# Altium PCB 24+Channel+PCB.pcbdoc (part 2 of 4)
Units mm, origin at the board's own origin, x right, y up, seen from the top; angles counter-clockwise.
Board outline 213.4 x 117.5 mm, 2 copper layers (Top Layer, Bottom Layer); 559 components, 339 nets, 1681 pads, 746 vias.
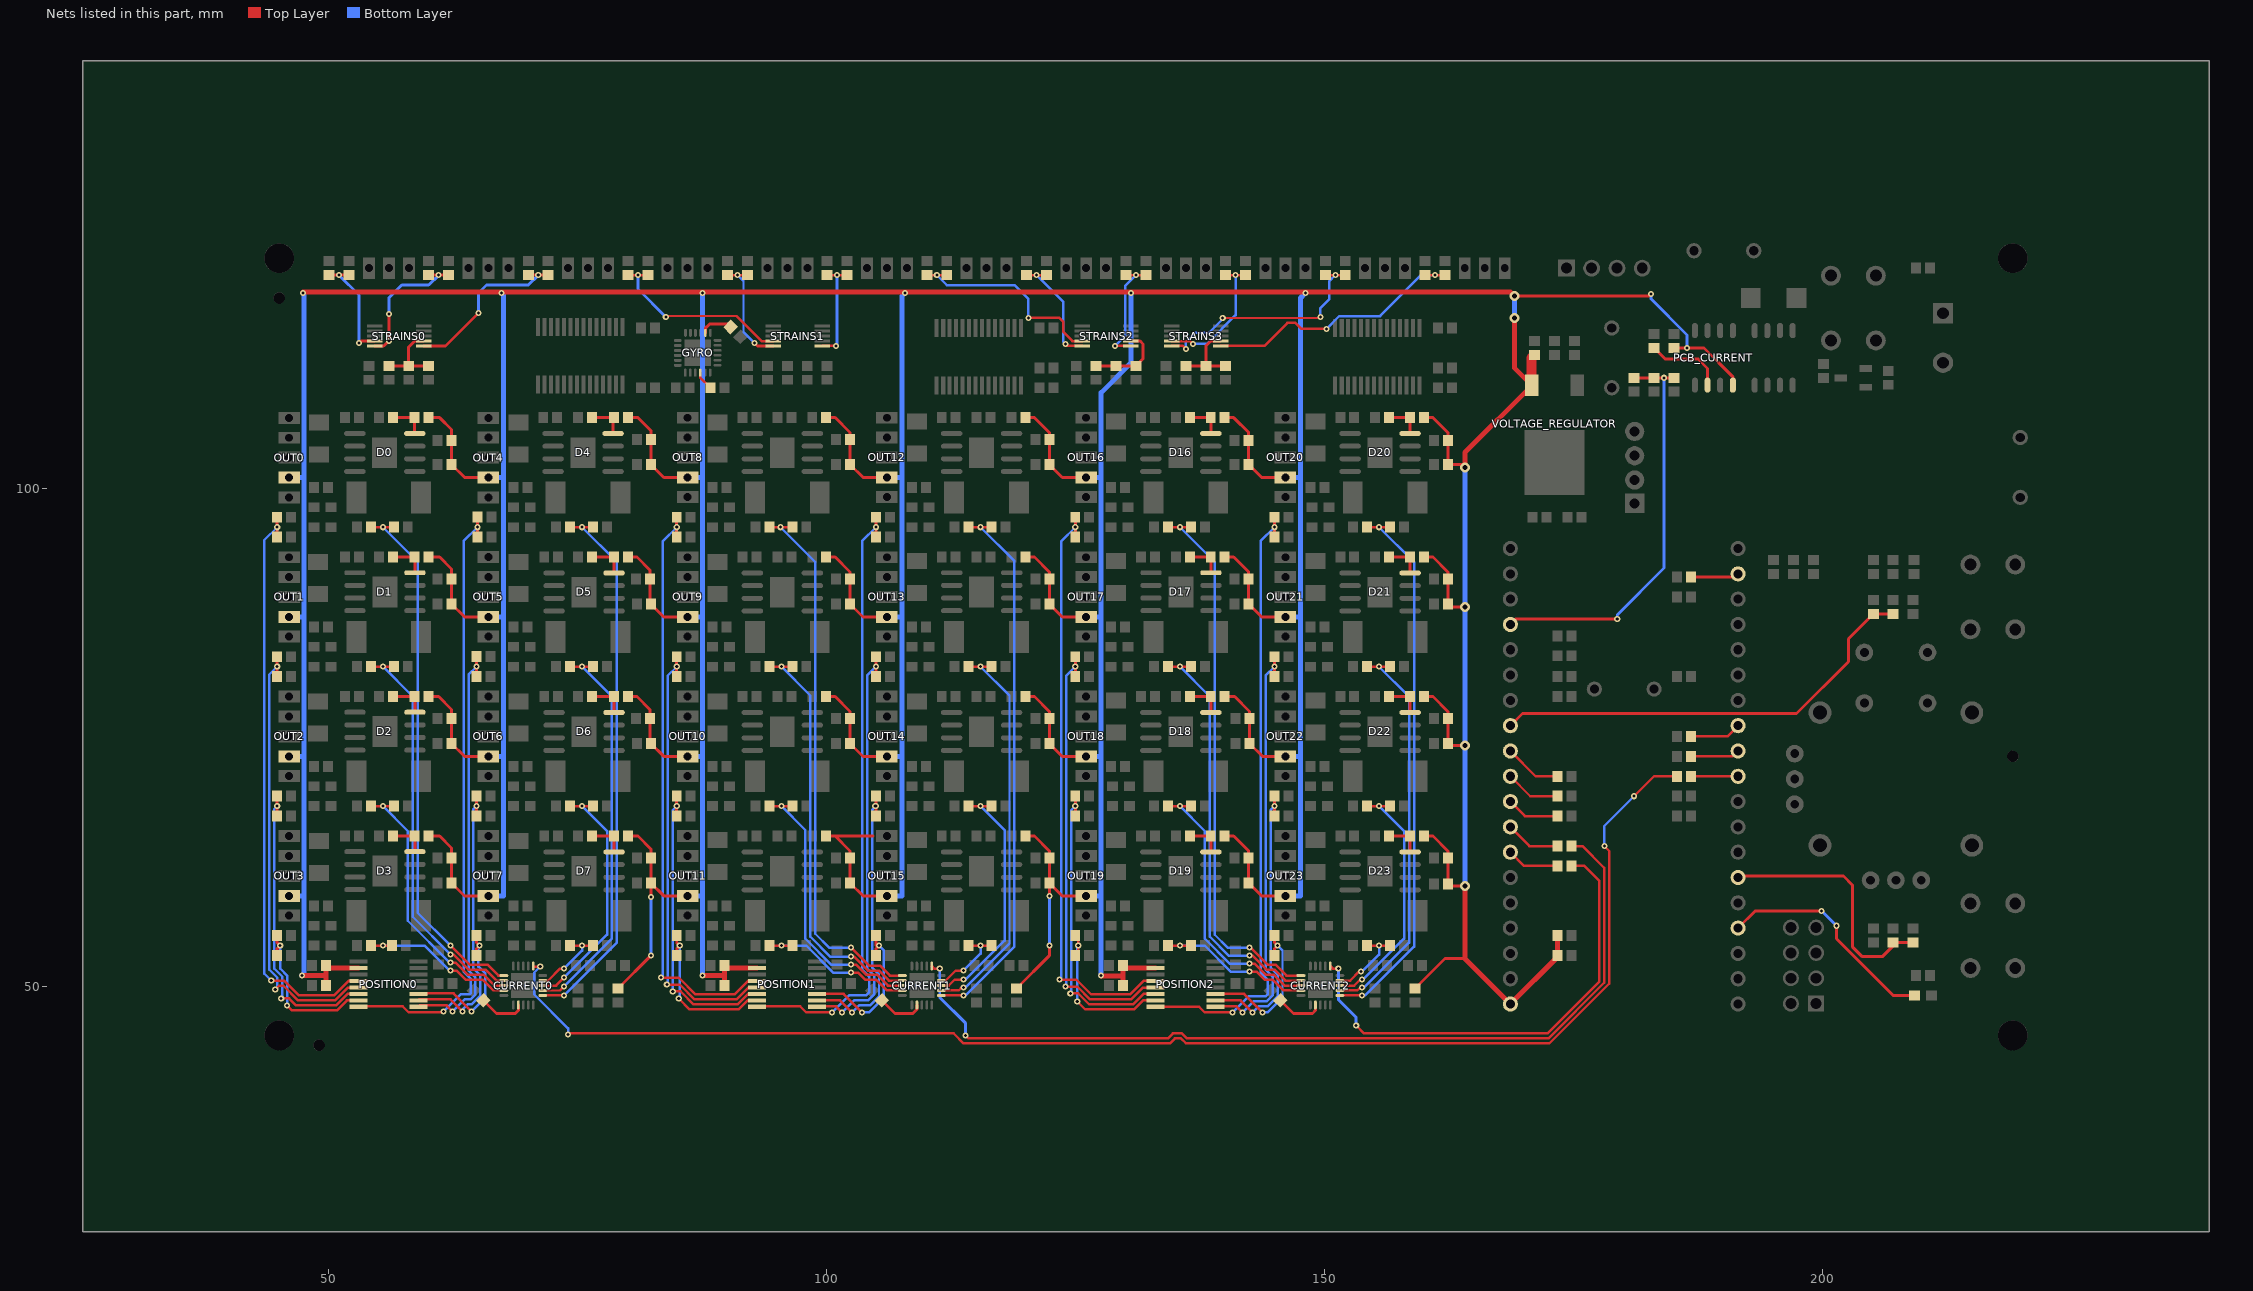
[diagram p2: the nets of this part, all layers, seen from the top]

## Via types
v1: diameter 0.61, hole 0.305, Top Layer to Bottom Layer, 627 vias
v2: diameter 1, hole 0.5, Top Layer to Bottom Layer, 113 vias
v3: diameter 2, hole 1, Top Layer to Bottom Layer, 6 vias

## Nets (pads, with @x,y where several pads share a name; then routed paths per layer and width w, separated by ;. In a path a pad name is that pad's centre, name@x,y a point inside that pad or via, vN(x,y) a via of type N, cw(c..) or ccw(c..) an arc to the next point about the centre after c; other vN are vias at no path point) (continued)
+5V: CCD.2 CESPD5V.1 CESPDD5V.1 CPDA0.1 CPDA1.1 CPDA2.1 CPDDA0.1 CPDDA1.1 CPDDA2.1 CVR3.2 OUT0.P2 OUT1.P2 OUT2.P2 OUT3.P2 OUT4.P2 OUT5.P2 OUT6.P2 OUT7.P2 OUT8.P2 OUT9.P2 OUT10.P2 OUT11.P2 OUT12.P2 OUT13.P2 OUT14.P2 OUT15.P2 OUT16.P2 OUT17.P2 OUT18.P2 OUT19.P2 OUT20.P2 OUT21.P2 OUT22.P2 OUT23.P2 pad.1 PCB_CURRENT.8 POSITION0.2 POSITION1.2 POSITION2.2 RCH0.1 RCH1.1 RCH2.1 RH0.2 RH1.2 RH2.2 RH3.2 RH4.2 RH5.2 RH6.2 RH7.2 RH8.2 RH9.2 RH10.2 RH11.2 RH12.2 RH13.2 RH14.2 RH15.2 RH16.2 RH17.2 RH18.2 RH19.2 RH20.2 RH21.2 RH22.2 RH23.2 RPWM0A.1 RPWM0B.1 RPWM1A.1 RPWM1B.1 RPWM2A.1 RPWM2B.1 RPWM3A.1 RPWM3B.1 RPWM4A.2 RPWM4B.2 RPWM5A.2 RPWM5B.2 RPWM6A.2 RPWM6B.2 RPWM7A.2 RPWM7B.2 RPWM8A.1 RPWM8B.1 RPWM9A.1 RPWM9B.1 RPWM10A.1 RPWM10B.1 RPWM11A.1 RPWM11B.1 RPWM12A.2 RPWM12B.2 RPWM13A.2 RPWM13B.2 RPWM14A.2 RPWM14B.2 RPWM15A.2 RPWM15B.2 RPWM16A.1 RPWM16B.1 RPWM17A.1 RPWM17B.1 RPWM18A.1 RPWM18B.1 RPWM19A.1 RPWM19B.1 RPWM20A.2 RPWM20B.2 RPWM21A.2 RPWM21B.2 RPWM22A.2 RPWM22B.2 RPWM23A.2 RPWM23B.2 VOLTAGE_REGULATOR.3 | length 964.8
  Top Layer w0.3: RH3.2@60.1,65.1 61.2,65.1 62.4,63.9 RPWM3A.1@62.4,62.9 RPWM3B.1@62.4,60.4 63.707,59.093 OUT7.P2@66.1,59.093 ; RH2.2@60.1,79.1 61.1,79.1 62.4,77.8 RPWM2A.1@62.4,76.9 RPWM2B.1@62.4,74.4 63.694,73.106 OUT6.P2@66.1,73.106 ; RH1.2@60.1,93.1 61.2,93.1 62.4,91.9 RPWM1A.1@62.4,90.9 RPWM1B.1@62.4,88.4 63.694,87.106 OUT5.P2@66.1,87.106 ; RH0.2@60.1,107.1 61.2,107.1 62.4,105.9 RPWM0A.1@62.4,104.8 RPWM0B.1@62.4,102.4 63.719,101.081 OUT4.P2@66.1,101.081 ; RCH0.1@79.1,49.801 v1(82.4,53.1) ; RH7.2@80.1,65.1 81.1,65.1 82.4,63.8 RPWM7A.2@82.4,62.9 RPWM7B.2@82.4,60.4 ; RH6.2@80.1,79.1 81,79.1 82.3,77.8 RPWM6A.2@82.3,76.9 82.3,74.5 RPWM6B.2@82.4,74.4 83.7,73.1 OUT10.P2@86.1,73.1 ; RH5.2@80.1,93.1 81,93.1 82.3,91.8 RPWM5A.2@82.3,90.9 82.3,88.5 RPWM5B.2@82.4,88.4 83.7,87.1 OUT9.P2@86.1,87.1 ; RH4.2@80.1,107.1 81.1,107.1 82.4,105.8 RPWM4A.2@82.4,104.9 RPWM4B.2@82.4,102.4 83.707,101.093 OUT8.P2@86.1,101.093 ; v1(82.4,59) RPWM7B.2@82.4,60.4 ; OUT11.P2@86.1,59.1 83.7,59.1 RPWM7B.2@82.4,60.4 ; RH11.2@100,65.1 104.716,65.099 ; RH11.2@100,65.1 100.9,65.1 102.4,63.6 RPWM11A.1@102.4,62.9 RPWM11B.1@102.4,60.4 103.707,59.093 OUT15.P2@106.1,59.093 ; RH10.2@100,79.1 100.9,79.1 102.4,77.6 RPWM10A.1@102.4,76.9 RPWM10B.1@102.4,74.4 103.707,73.094 OUT14.P2@106.1,73.094 ; RH9.2@100,93.1 100.9,93.1 102.4,91.6 RPWM9A.1@102.4,90.9 RPWM9B.1@102.4,88.4 103.706,87.093 OUT13.P2@106.1,87.093 ; RH8.2@99.999,107.101 100.901,107.101 102.4,105.6 RPWM8A.1@102.4,104.9 ; RPWM8A.1@102.4,104.9 RPWM8B.1@102.4,102.4 103.707,101.093 OUT12.P2@106.1,101.093 ; RCH1.1@119.1,49.801 122.4,53.1 v1(122.4,54.1) ; RH15.2@120,65.1 120.9,65.1 122.4,63.6 RPWM15A.2@122.4,62.9 RPWM15B.2@122.4,60.4 ; RH14.2@120,79.1 120.9,79.1 122.4,77.6 RPWM14A.2@122.4,76.9 RPWM14B.2@122.4,74.4 123.706,73.094 OUT18.P2@126.1,73.094 ; RH13.2@120,93.1 120.9,93.1 122.4,91.6 RPWM13A.2@122.4,90.9 RPWM13B.2@122.4,88.4 ; RH12.2@120,107.1 120.9,107.1 122.4,105.6 RPWM12A.2@122.4,104.9 RPWM12B.2@122.4,102.4 123.707,101.093 OUT16.P2@126.1,101.093 ; v1(122.4,59.1) RPWM15B.2@122.4,60.4 ; RPWM13B.2@122.4,88.4 123.707,87.093 OUT17.P2@126.1,87.093 ; OUT19.P2@126.1,59.093 123.707,59.093 RPWM15B.2@122.4,60.4 ; RH19.2@140,65.1 140.9,65.1 142.4,63.6 RPWM19A.1@142.4,62.9 RPWM19B.1@142.4,60.4 143.707,59.093 OUT23.P2@146.1,59.093 ; RH18.2@140,79.1 141,79.1 142.5,77.6 RPWM18A.1@142.5,76.9 RPWM18B.1@142.5,74.4 143.807,73.094 OUT22.P2@146.1,73.094 ; RH17.2@140,93.1 140.9,93.1 142.4,91.6 RPWM17A.1@142.4,90.9 RPWM17B.1@142.4,88.4 143.707,87.093 OUT21.P2@146.1,87.093 ; RH16.2@140,107.1 140.9,107.1 142.4,105.6 RPWM16A.1@142.4,104.8 RPWM16B.1@142.4,102.4 143.707,101.093 OUT20.P2@146.1,101.093 ; RCH2.1@159.1,49.8 162.11,52.81 164.1,52.81 ; RH23.2@160,65.1 160.9,65.1 162.4,63.6 RPWM23A.2@162.4,62.9 RPWM23B.2@162.4,60.3 162.6,60.1 v2(164.1,60.1) ; RH22.2@160,79.1 160.9,79.1 162.4,77.6 RPWM22A.2@162.4,76.9 RPWM22B.2@162.4,74.4 162.6,74.2 v2(164.1,74.2) ; RH21.2@160,93.1 160.9,93.1 162.4,91.6 RPWM21A.2@162.4,90.9 RPWM21B.2@162.4,88.4 162.7,88.1 v2(164.1,88.1) ; RH20.2@160,107.1 160.9,107.1 162.4,105.6 RPWM20A.2@162.4,104.8 RPWM20B.2@162.4,102.4 163.8,102.4 v2(164.1,102.1) ; v2@169.1,119.3 182.6,119.3 v1(182.8,119.5) ; CCD.2@185.1,114.1 v1(186.4,114.1) 188.1,114.1 191.005,111.195 PCB_CURRENT.8@191.005,110.36
  Top Layer w0.5: v1(47.4,51.1) 49.8,51.1 ; v1@47.5,119.699 v1@67.401,119.699 ; CPDA0.1@49.8,50.1 CPDDA0.1@49.8,52.1 50.047,51.852 POSITION0.2@53.062,51.852 ; v1@67.4,119.7 87.5,119.7 v1(87.6,119.6) ; v1(87.6,51.1) 89.798,51.1 89.8,51.102 ; v1@87.599,119.699 v1@107.901,119.699 ; CPDA1.1@89.8,50.1 CPDDA1.1@89.8,52.1 90.048,51.852 POSITION1.2@93.062,51.852 ; v1@107.901,119.599 108.001,119.699 130.5,119.699 v1@130.6,119.599 ; v1(127.6,51.1) 127.626,51.074 129.8,51.074 ; CPDA2.1@129.8,50.1 CPDDA2.1@129.8,52.1 130.048,51.852 POSITION2.2@133.062,51.852 ; v1@130.599,119.699 148,119.699 v1(148.1,119.6) 148.199,119.699 168.701,119.699 v2(169.1,119.3) ; v2(164.1,102.1) 164.099,103.601 170.809,110.311 VOLTAGE_REGULATOR.3@170.81,110.347 169.1,112.057 v2(169.1,117.1) ; v2(164.1,60.1) 164.1,52.81 pad.1@168.67,48.24 173.4,52.97 CESPD5V.1@173.4,53.1 CESPDD5V.1@173.4,55.1
  Top Layer w1: VOLTAGE_REGULATOR.3@170.81,110.347 170.81,113.11 CVR3.2@171.1,113.4
  Bottom Layer w0.3: v1(82.4,53.1) v1(82.4,59) ; v1(122.4,54.1) v1(122.4,59.1) ; v1@182.801,119.501 182.801,119.001 186.4,115.399 v1@186.4,114.101
  Bottom Layer w0.5: OUT3.P2@46.1,59.093 47.6,59.093 ; OUT2.P2@46.1,73.094 47.6,73.094 ; OUT1.P2@46.1,87.093 47.6,87.093 ; OUT0.P2@46.1,101.069 47.6,101.069 ; v1(47.4,51.1) 47.6,51.3 47.6,119.5 v1(47.5,119.6) ; OUT6.P2@66.1,73.106 67.599,73.106 ; OUT5.P2@66.1,87.106 67.599,87.106 ; OUT4.P2@66.1,101.081 67.599,101.081 ; v1@67.401,119.6 67.599,119.402 67.599,59.093 ; OUT11.P2@86.1,59.1 87.6,59.1 ; OUT10.P2@86.1,73.1 87.6,73.1 ; OUT9.P2@86.1,87.1 87.6,87.1 ; OUT8.P2@86.1,101.093 87.593,101.093 87.599,101.1 ; v1(87.6,51.1) v1(87.6,119.6) ; OUT15.P2@106.1,59.093 107.6,59.093 ; OUT14.P2@106.1,73.094 107.579,73.094 107.6,73.073 ; OUT13.P2@106.1,87.093 107.6,87.093 ; OUT12.P2@106.1,101.093 107.592,101.093 107.6,101.102 ; 107.6,59.1 107.6,119.3 v1(107.9,119.6) ; OUT19.P2@126.1,59.093 127.599,59.093 ; OUT18.P2@126.1,73.094 127.599,73.094 ; OUT17.P2@126.1,87.093 127.599,87.093 ; OUT16.P2@126.1,101.093 127.599,101.093 ; v1(127.6,51.1) 127.6,109.599 130.601,112.6 v1@130.601,119.6 ; OUT23.P2@146.1,59.093 147.593,59.093 147.6,59.1 ; OUT22.P2@146.1,73.094 147.591,73.094 147.6,73.103 ; OUT21.P2@146.1,87.093 147.6,87.093 ; OUT20.P2@146.1,101.093 147.6,101.093 ; 147.6,59.1 147.6,119.1 v1(148.1,119.6) ; v2(164.1,60.1) v2(164.1,74.2) v2(164.1,88.1) v2(164.1,102.1) ; v2(169.1,117.1) v2(169.1,119.3) ; 67.599,59.093 OUT7.P2@66.1,59.093 67.599,59.093
  other v1: 67.4,119.6 130.6,119.6
BTN0: CBTN0LP.1 pad.25 RBTN0L.1 | length 25.4
  Top Layer w0.3: pad.25@191.531,60.941 191.691,61.099 202.1,61.099 202.999,60.2 202.999,54 204,52.999 206.001,52.999 207.101,54.099 RBTN0L.1@207.101,54.401 ; RBTN0L.1@207.1,54.4 CBTN0LP.1@209.1,54.4
BTN1: CBTN1LP.1 pad.12 RBTN1L.1 | length 44.4
  Top Layer w0.3: pad.12@168.671,76.181 169.89,77.401 197.401,77.401 202.6,82.6 202.6,84.901 205.099,87.401 RBTN1L.1@207.1,87.4
CCF_2: CCF.2 PCB_CURRENT.6 | length 7.9
  Top Layer w0.3: CCF.2@183.1,114.101 184.2,113.001 187.5,113.001 188.465,112.036 PCB_CURRENT.6@188.465,110.36
CCREFIN1_2: CCREFIN1.2 CURRENT1.2 | length 4.7
  Top Layer w0.3: CCREFIN1.2@105.595,48.605 106.9,47.299 108.699,47.299 109.1,47.7 CURRENT1.2@109.1,48.15
CGC_2: CGC.2 GYRO.20 | length 3.3
  Top Layer w0.3: GYRO.20@87.87,115.613 87.87,116.07 88.3,116.5 90.1,116.5 CGC.2@90.405,116.195
CGR_1: CGR.1 GYRO.10 | length 1.9
  Top Layer w0.25: GYRO.10@87.354,111.613 87.354,111.146 CGR.1@88.4,110.1
CS0_1: CS0.1 RSH0.2 RSL0.1 STRAINS0.7 | length 8.8
  Top Layer w0.3: RSH0.2@56.1,112.3 RSL0.1@58.1,112.3 ; 58.9,112.3 CS0.1@60.1,112.3 RSL0.1@58.1,112.3 ; STRAINS0.7@59.589,114.79 58.71,114.79 58.7,114.8 58.1,114.2 RSL0.1@58.1,112.3
CS2_1: CS2.1 RSH2.2 RSL2.1 STRAINS2.7 | length 7.8
  Top Layer w0.3: RSH2.2@127.101,112.3 CS2.1@131.1,112.3 131.8,113 131.8,114.5 131.51,114.79 STRAINS2.7@130.589,114.79
CS3_1: CS3.1 RSH3.2 RSL3.1 STRAINS3.7 | length 7.7
  Top Layer w0.3: RSH3.2@136.1,112.3 CS3.1@140.1,112.3 ; RSL3.1@138.1,112.3 138.099,114.299 138.59,114.789 STRAINS3.7@139.59,114.79
CURR0_CNV: CURRENT0.11 RCURR0CS.1 | length 142.4
  Top Layer w0.25: CURRENT0.11@70.6,52.05 70.65,52 v1(71.3,52) ; v1@74.099,45.201 74.198,45.3 112.801,45.3 113.802,44.299 134.5,44.299 135,44.8 135.6,44.8 136.098,44.302 172.6,44.302 178.6,50.299 178.6,63.601 v1@178.099,64.101 ; v1(181.1,69.1) 183.1,71.1 RCURR0CS.1@185.4,71.1
  Bottom Layer w0.25: v1(71.3,52) 70.7,51.4 70.7,49.2 74.1,45.8 v1(74.1,45.2) ; v1(178.1,64.1) 178.1,66.1 v1(181.1,69.1)
CURR1_CNV: CURRENT1.11 RCURR1CS.2 | length 91.4
  Top Layer w0.25: CURRENT1.11@110.6,52.05 110.85,51.8 v1(111.4,51.8) ; v1(114,45.1) 114.299,44.8 134.299,44.8 134.8,45.3 135.699,45.3 136.199,44.8 172.499,44.8 178.099,50.4 178.099,61.902 175.9,64.101 RCURR1CS.2@174.8,64.101
  Bottom Layer w0.3: v1(111.4,51.8) 111.399,48.899 114,46.301 v1(114,45.1)
CURR2_CNV: CURRENT2.11 RCURR2CS.2 | length 47.8
  Top Layer w0.25: CURRENT2.11@150.6,52.05 150.85,51.8 v1(151.4,51.8) ; v1(153.2,46.1) 154,45.3 172.399,45.3 177.599,50.499 177.599,60.601 176.1,62.1 RCURR2CS.2@174.8,62.1
  Bottom Layer w0.3: v1(151.4,51.8) 151.399,48.701 153.2,46.9 v1(153.2,46.1)
CURRENT0_2: CCREFIN0.2 CURRENT0.2 | length 4.7
  Top Layer w0.3: CCREFIN0.2@65.595,48.605 66.901,47.299 68.8,47.299 69.1,47.599 CURRENT0.2@69.1,48.15
CURRENT2_2: CCREFIN2.2 CURRENT2.2 | length 4.7
  Top Layer w0.3: CCREFIN2.2@145.595,48.605 146.9,47.3 148.8,47.3 149.1,47.6 CURRENT2.2@149.1,48.15
CURRENT_IN: CCLP.2 pad.16 RCH.1 RCL.2 | length 41.1
  Top Layer w0.3: pad.16@168.67,86.34 169.23,86.9 v1(179.4,86.9) ; RCL.2@181.1,111.1 RCH.1@183.099,111.1 ; RCH.1@183.1,111.1 v1(184.1,111.1) CCLP.2@185.1,111.1
  Bottom Layer w0.3: v1(179.4,86.9) 179.4,87.3 184.1,92 v1(184.1,111.1)
D0_4: D0.4 RH0.1 RL0.1 | length 3.8
  Top Layer w0.3: RL0.1@56.5,107.1 RH0.1@58.7,107.1 58.7,105.515 D0.4@58.71,105.505
D1_4: D1.4 RH1.1 RL1.1 | length 4.1
  Top Layer w0.3: RL1.1@56.5,93.1 RH1.1@58.7,93.1 ; D1.4@58.723,91.53 58.723,93.077 RH1.1@58.7,93.1 ; RH1.1@58.6,93.1 RH1.1@58.7,93.1 ; RH1.1@58.6,93.1 RH1.1@58.7,93.1 ; RH1.1@58.6,93.1 RH1.1@58.7,93.1
D2_4: D2.4 RH2.1 RL2.1 | length 3.8
  Top Layer w0.3: RL2.1@56.5,79.1 RH2.1@58.7,79.1 58.723,79.077 D2.4@58.723,77.53
D3_4: D3.4 RH3.1 RL3.1 | length 3.8
  Top Layer w0.3: RL3.1@56.5,65.1 RH3.1@58.7,65.1 58.723,65.077 D3.4@58.723,63.53
D4_4: D4.4 RH4.1 RL4.1 | length 3.8
  Top Layer w0.3: RL4.1@76.499,107.101 78.699,107.101 78.61,107.01 D4.4@78.61,105.505
D5_4: D5.4 RH5.1 RL5.1 | length 3.8
  Top Layer w0.3: RL5.1@76.5,93.1 RH5.1@78.7,93.1 78.7,91.515 D5.4@78.71,91.505
D6_4: D6.4 RH6.1 RL6.1 | length 3.8
  Top Layer w0.3: RL6.1@76.5,79.1 RH6.1@78.7,79.1 78.71,79.09 D6.4@78.71,77.505
D7_4: D7.4 RH7.1 RL7.1 | length 3.8
  Top Layer w0.3: RL7.1@76.5,65.1 RH7.1@78.7,65.1 78.71,65.09 D7.4@78.71,63.505
D16_4: D16.4 RH16.1 RL16.1 | length 3.7
  Top Layer w0.3: RL16.1@136.5,107.1 RH16.1@138.6,107.1 138.61,107.09 D16.4@138.61,105.505
D17_4: D17.4 RH17.1 RL17.1 | length 3.7
  Top Layer w0.3: RL17.1@136.5,93.1 RH17.1@138.6,93.1 138.623,93.077 D17.4@138.623,91.53
D18_4: D18.4 RH18.1 RL18.1 | length 3.7
  Top Layer w0.3: RL18.1@136.5,79.1 RH18.1@138.6,79.1 138.61,79.09 D18.4@138.61,77.505
D19_4: D19.4 RH19.1 RL19.1 | length 3.7
  Top Layer w0.3: RL19.1@136.5,65.1 RH19.1@138.6,65.1 138.61,65.09 D19.4@138.61,63.505
D20_4: D20.4 RH20.1 RL20.1 | length 3.7
  Top Layer w0.3: RL20.1@156.5,107.1 RH20.1@158.6,107.1 158.61,107.09 D20.4@158.61,105.505
D21_4: D21.4 RH21.1 RL21.1 | length 3.7
  Top Layer w0.3: RL21.1@156.5,93.1 RH21.1@158.6,93.1 D21.4@158.61,91.505
D22_4: D22.4 RH22.1 RL22.1 | length 3.7
  Top Layer w0.3: RL22.1@156.5,79.1 RH22.1@158.6,79.1 158.61,79.09 D22.4@158.61,77.505
D23_4: D23.4 RH23.1 RL23.1 | length 3.7
  Top Layer w0.3: RL23.1@156.5,65.1 RH23.1@158.6,65.1 158.61,65.09 D23.4@158.61,63.505
ESP32_7: pad.7 RCURR2CS.1 | length 5.3
  Top Layer w0.25: pad.7@168.67,63.48 170.05,62.1 RCURR2CS.1@173.4,62.1
ESP32_8: pad.8 RCURR1CS.1 | length 5.5
  Top Layer w0.25: pad.8@168.67,66.02 170.59,64.1 RCURR1CS.1@173.4,64.1
ESP32_9: pad.9 RPOS2CS.1 | length 5.3
  Top Layer w0.25: pad.9@168.67,68.56 170.13,67.1 RPOS2CS.1@173.4,67.1
ESP32_10: pad.10 RPOS1CS.1 | length 5.6
  Top Layer w0.25: pad.10@168.67,71.1 170.67,69.1 RPOS1CS.1@173.4,69.1
ESP32_11: pad.11 RPOS0CS.1 | length 5.8
  Top Layer w0.25: pad.11@168.67,73.64 171.21,71.1 RPOS0CS.1@173.4,71.1
ESP32_23: LED0.1 pad.23 | length 22.7
  Top Layer w0.3: pad.23@191.531,55.861 193.269,57.6 v1(199.9,57.6) ; v1(201.4,56.1) 201.4,54.801 207.101,49.1 LED0.1@209.249,49.1
  Bottom Layer w0.3: v1(199.9,57.6) v1(201.4,56.1)
ESP32_29: pad.29 RCURR0CS.2 | length 4.7
  Top Layer w0.25: RCURR0CS.2@186.8,71.1 pad.29@191.53,71.1
ESP32_30: pad.30 RCLCK.2 | length 5
  Top Layer w0.25: RCLCK.2@186.8,73.1 190.99,73.1 pad.30@191.53,73.64
ESP32_31: pad.31 RMISO.2 | length 5.2
  Top Layer w0.25: RMISO.2@186.8,75.1 190.45,75.1 pad.31@191.53,76.18
ESP32_37: pad.37 RMOSI.2 | length 4.9
  Top Layer w0.3: RMOSI.2@186.8,91.1 191.21,91.1 pad.37@191.53,91.42
FILTERED_POS0: CPLP0.1 POSITION0.4 RPLP0.1 | length 58.3
  Top Layer w0.25: v1@44.3,50.601 45.599,50.601 47.1,49.1 50.599,49.1 52.056,50.557 POSITION0.4@53.062,50.557
  Top Layer w0.3: RPLP0.1@44.9,95.1 v1(44.9,96.1) CPLP0.1@44.9,97.1
  Bottom Layer w0.25: v1@44.3,50.601 43.601,51.3 43.601,94.8 v1(44.9,96.1)
  other v1: 44.3,50.6
FILTERED_POS1: CPLP1.1 POSITION0.5 RPLP1.1 | length 44.8
  Top Layer w0.25: v1(44.7,49.7) 45.1,50.1 45.5,50.1 47,48.599 50.7,48.599 51.998,49.897 POSITION0.5@53.062,49.897
  Top Layer w0.3: RPLP1.1@44.9,81.1 v1(44.9,82.1) CPLP1.1@44.9,83.1
  Bottom Layer w0.25: v1(44.7,49.7) 44.9,49.9 44.9,50.9 44.1,51.7 44.1,81.3 v1(44.9,82.1)
FILTERED_POS2: CPLP2.1 POSITION0.6 RPLP2.1 | length 30.3
  Top Layer w0.25: v1(45.3,48.8) 46.1,48.8 46.801,48.099 50.799,48.099 51.962,49.262 POSITION0.6@53.062,49.262
  Top Layer w0.3: RPLP2.1@44.9,67.1 v1(44.9,68.1) CPLP2.1@44.9,69.1
  Bottom Layer w0.25: v1(44.9,68.1) 44.599,67.799 44.599,51.8 45.399,51 45.399,48.899 v1(45.3,48.8)
FILTERED_POS3: CPLP3.1 POSITION0.7 RPLP3.1 | length 16.3
  Top Layer w0.25: v1(45.9,48.1) 46.401,47.599 50.899,47.599 51.901,48.601 POSITION0.7@53.062,48.601
  Top Layer w0.3: RPLP3.1@44.9,53.1 44.9,53.8 v1(45.2,54.1) 44.9,54.4 CPLP3.1@44.9,55.1
  Bottom Layer w0.25: v1(45.2,54.1) 45.2,51.8 45.9,51.1 v1(45.9,48.1)
FILTERED_POS4: CPLP4.1 POSITION0.8 RPLP4.2 | length 62
  Top Layer w0.25: POSITION0.8@53.063,47.967 53.096,48 57.5,48 58.099,47.401 61.501,47.401 v1(61.6,47.5)
  Top Layer w0.3: RPLP4.2@65,95.124 v1(65,96.1) CPLP4.1@65,97.124
  Bottom Layer w0.25: v1(61.6,47.5) 63.299,49.199 64.201,49.199 64.3,49.301 64.3,50.802 63.601,51.5 63.601,94.701 v1(65,96.1)
FILTERED_POS5: CPLP5.1 POSITION0.9 RPLP5.2 | length 42.3
  Top Layer w0.25: POSITION0.9@59.062,47.966 59.195,48.1 61.9,48.1 v1(62.5,47.5)
  Top Layer w0.3: RPLP5.2@64.9,81.112 v1(64.9,82.1) CPLP5.1@64.9,83.112
  Bottom Layer w0.25: v1(62.5,47.5) 63.7,48.701 64.3,48.701 64.8,49.199 64.8,50.901 64.099,51.599 64.099,81.299 v1(64.9,82.1)
FILTERED_POS6: CPLP6.1 POSITION0.10 RPLP6.2 | length 29
  Top Layer w0.25: POSITION0.10@59.062,48.601 59.16,48.699 62.3,48.699 v1(63.5,47.5)
  Top Layer w0.3: RPLP6.2@64.9,67.112 v1(64.9,68.1) CPLP6.1@64.9,69.112
  Bottom Layer w0.25: v1(63.5,47.5) 63.499,47.7 64,48.201 64.401,48.201 65.3,49.1 65.3,51.099 64.599,51.8 64.599,67.799 v1(64.9,68.1)
FILTERED_POS7: CPLP7.1 POSITION0.11 RPLP7.2 | length 15.9
  Top Layer w0.25: POSITION0.11@59.062,49.262 59.937,49.262 59.975,49.3 62.598,49.3 v1(64.4,47.5)
  Top Layer w0.3: RPLP7.2@64.9,53.112 64.9,53.8 v1(65.2,54.1) 64.9,54.4 CPLP7.1@64.9,55.112
  Bottom Layer w0.25: v1(64.4,47.5) 65.801,48.902 65.801,51.3 65.1,52.001 65.1,54 v1@65.201,54.099
FILTERED_POS8: CPLP8.1 POSITION1.4 RPLP8.1 | length 58.8
  Top Layer w0.25: v1@83.4,50.901 85.201,50.901 86.901,49.199 90.799,49.199 92.158,50.558 POSITION1.4@93.063,50.558
  Top Layer w0.3: RPLP8.1@85,95.1 v1(85,96.1) CPLP8.1@85,97.1
  Bottom Layer w0.25: v1(83.4,50.9) 83.601,51.101 83.601,94.7 v1@85.001,96.1
FILTERED_POS9: CPLP9.1 POSITION1.5 RPLP9.1 | length 44.5
  Top Layer w0.25: v1(84,50.2) 85.3,50.2 86.799,48.701 91,48.701 92.196,49.897 POSITION1.5@93.063,49.897
  Top Layer w0.3: RPLP9.1@85,81.1 v1(85,82.1) CPLP9.1@85,83.1
  Bottom Layer w0.25: v1(84,50.2) 84.099,50.299 84.099,81.198 v1@85.001,82.1
FILTERED_POS10: CPLP10.1 POSITION1.6 RPLP10.1 | length 30.2
  Top Layer w0.25: v1@84.599,49.501 85.399,49.501 86.7,48.201 91.099,48.201 92.161,49.262 POSITION1.6@93.063,49.262
  Top Layer w0.3: RPLP10.1@85,67.1 v1(85,68.1) CPLP10.1@85,69.1
  Bottom Layer w0.25: v1(84.6,49.5) 84.6,67.7 v1@85.001,68.099
FILTERED_POS11: CPLP11.1 POSITION1.7 RPLP11.1 | length 16.3
  Top Layer w0.25: v1@85.201,48.8 86.299,47.7 91.201,47.7 92.102,48.602 POSITION1.7@93.063,48.602
  Top Layer w0.3: RPLP11.1@85.001,53.1 85.001,53.799 v1(85.3,54.1) 85.001,54.401 CPLP11.1@85.001,55.099
  Bottom Layer w0.25: v1(85.2,48.8) 85.3,48.9 v1(85.3,54.1)
FILTERED_POS12: CPLP12.1 POSITION1.8 RPLP12.2 | length 61.9
  Top Layer w0.25: POSITION1.8@93.062,47.966 93.095,48 97.4,48 98,47.4 v1(100.6,47.4)
  Top Layer w0.3: RPLP12.2@105,95.1 v1(105,96.1) CPLP12.1@105,97.1
  Bottom Layer w0.25: v1@100.599,47.401 102.301,49.1 104,49.1 104.3,49.4 104.3,51 103.601,51.701 103.601,94.701 v1(105,96.1)
FILTERED_POS13: CPLP13.1 POSITION1.9 RPLP13.2 | length 42.3
  Top Layer w0.25: POSITION1.9@99.062,47.966 99.095,48 101,48 v1(101.6,47.4)
  Top Layer w0.3: RPLP13.2@105,81.1 v1(105,82.1) CPLP13.1@105,83.1
  Bottom Layer w0.25: v1@101.599,47.401 102.801,48.6 104.2,48.6 104.8,49.199 104.8,51.099 104.099,51.8 104.099,81.2 v1(105,82.1)
FILTERED_POS14: CPLP14.1 POSITION1.10 RPLP14.2 | length 30.1
  Top Layer w0.25: POSITION1.10@99.062,48.601 101.399,48.601 v1(102.6,47.4)
  Top Layer w0.3: v1@105,68.2 RPLP14.2@105,67.1 v1(105,68.1) CPLP14.1@105,69.1
  Bottom Layer w0.25: v1@102.6,47.401 103.301,48.099 104.401,48.099 105.3,49.001 105.3,51.2 104.599,51.899 104.599,67.7 v1(105,68.1)
  other v1: 104.9,68.1
FILTERED_POS15: CPLP15.1 POSITION1.11 RPLP15.2 | length 16.8
  Top Layer w0.25: POSITION1.11@99.062,49.262 101.738,49.262 v1(103.6,47.4)
  Top Layer w0.3: RPLP15.2@105,53.1 105,53.8 v1(105.3,54.1) 105,54.4 CPLP15.1@105,55.1 v1@105,54.1
  Bottom Layer w0.25: v1@103.601,47.401 104.3,47.401 105.801,48.899 105.801,53.601 v1(105.3,54.1)
FILTERED_POS16: CPLP16.1 POSITION2.4 RPLP16.1 | length 58.9
  Top Layer w0.25: v1(123.4,50.7) 125.1,50.7 126.601,49.199 130.5,49.199 131.859,50.558 POSITION2.4@133.062,50.558
  Top Layer w0.3: RPLP16.1@125,95.1 v1(125,96.1) CPLP16.1@125,97.1
  Bottom Layer w0.25: v1(123.4,50.7) 123.6,50.9 123.6,94.7 v1(125,96.1)
FILTERED_POS17: CPLP17.1 POSITION2.5 RPLP17.1 | length 44.6
  Top Layer w0.25: v1(124,50) 125.201,49.999 126.499,48.701 130.601,48.701 131.798,49.897 POSITION2.5@133.062,49.897
  Top Layer w0.3: RPLP17.1@125,81.1 v1(125,82.1) CPLP17.1@125,83.1
  Bottom Layer w0.25: v1(124,50) 124.1,50.1 124.1,81.2 v1(125,82.1)
FILTERED_POS18: CPLP18.1 POSITION2.6 RPLP18.1 | length 30.5
  Top Layer w0.25: v1(124.5,49.3) 125.3,49.3 126.4,48.2 130.8,48.2 131.862,49.262 POSITION2.6@133.062,49.262
  Top Layer w0.3: RPLP18.1@125,67.1 v1(125,68.1) CPLP18.1@125,69.1
  Bottom Layer w0.25: v1@124.5,49.301 124.599,49.4 124.599,67.7 v1(125,68.1)
FILTERED_POS19: CPLP19.1 POSITION2.7 RPLP19.1 | length 16.5
  Top Layer w0.25: v1@125.201,48.5 125.999,47.7 130.901,47.7 131.803,48.602 POSITION2.7@133.062,48.602
  Top Layer w0.3: RPLP19.1@125,53.1 125.3,53.4 v1(125.3,54.1) 125.3,54.8 CPLP19.1@125,55.1
  Bottom Layer w0.25: v1(125.2,48.5) 125.2,54 v1(125.3,54.1)
FILTERED_POS20: CPLP20.1 POSITION2.8 RPLP20.2 | length 62
  Top Layer w0.25: POSITION2.8@133.062,47.967 137.434,47.967 138,47.401 v1@140.799,47.401
  Top Layer w0.3: RPLP20.2@145,95.1 v1(145,96.1) CPLP20.1@145,97.1
  Bottom Layer w0.25: v1@140.799,47.401 142.4,49.001 144.101,49.001 144.299,49.199 144.299,50.7 143.601,51.401 143.601,94.701 v1(145,96.1)
  other v1: 140.8,47.4
FILTERED_POS21: CPLP21.1 POSITION2.9 RPLP21.2 | length 42.4
  Top Layer w0.25: POSITION2.9@139.062,47.967 139.095,48 141.201,48 v1@141.8,47.401
  Top Layer w0.3: RPLP21.2@145,81.1 v1(145,82.1) CPLP21.1@145,83.1
  Bottom Layer w0.25: v1@141.8,47.401 142.9,48.5 144.2,48.5 144.8,49.1 144.8,51 144.101,51.701 144.101,81.2 v1(145,82.1)
  other v1: 141.8,47.4
FILTERED_POS22: CPLP22.1 POSITION2.10 RPLP22.2 | length 29
  Top Layer w0.25: POSITION2.10@139.062,48.601 141.599,48.601 v1(142.8,47.4)
  Top Layer w0.3: RPLP22.2@145,67.1 v1(145,68.1) CPLP22.1@145,69.1
  Bottom Layer w0.25: v1@142.801,47.401 143.4,48 144.299,48 145.3,49.001 145.3,51.2 144.599,51.899 144.599,67.7 v1(145,68.1)
FILTERED_POS23: CPLP23.1 POSITION2.11 RPLP23.2 | length 15.8
  Top Layer w0.25: POSITION2.11@139.062,49.262 141.938,49.262 v1(143.8,47.4)
  Top Layer w0.3: RPLP23.2@145,53.1 145,53.8 v1(145.3,54.1) 145,54.4 CPLP23.1@145,55.1
  Bottom Layer w0.25: v1@143.799,47.401 144.299,47.401 145.801,48.899 145.801,53.601 v1(145.3,54.1)
FILTERED_SENSE0: CLP0.2 CURRENT0.16 RLP0.1 | length 53.7
  Top Layer w0.25: RLP0.1@54.3,96.1 v1(55.5,96.1) CLP0.2@56.6,96.1 ; v1(62.3,54.1) 64.201,52.199 65.999,52.199 67.098,51.1 CURRENT0.16@67.65,51.1
  Bottom Layer w0.25: v1(55.5,96.1) 59.001,92.599 59.001,57.398 v1@62.301,54.101
FILTERED_SENSE1: CLP1.1 CURRENT0.17 RLP1.2 | length 40.2
  Top Layer w0.25: RLP1.2@54.3,82.1 v1(55.5,82.1) CLP1.1@56.6,82.1 ; v1@62.501,53.202 62.6,53.202 64.101,51.701 65.801,51.701 66.902,50.6 CURRENT0.17@67.65,50.6
  Bottom Layer w0.25: v1(55.5,82.1) 58.501,79.099 58.501,56.999 v1(62.3,53.2)
FILTERED_SENSE2: CLP2.1 CURRENT0.18 RLP2.2 | length 27.2
  Top Layer w0.25: RLP2.2@54.3,68.1 v1(55.5,68.1) CLP2.1@56.6,68.1 ; v1(62.3,52.4) 62.801,52.399 64,51.201 65.6,51.201 66.701,50.1 CURRENT0.18@67.65,50.1
  Bottom Layer w0.25: v1(55.5,68.1) 58,65.599 58,56.6 62.199,52.399 v1(62.3,52.4)
FILTERED_SENSE3: CLP3.1 CURRENT0.19 RLP3.2 | length 16.1
  Top Layer w0.25: RLP3.2@54.3,54.1 v1(55.5,54.1) CLP3.1@56.4,54.1 ; v1(62.3,51.6) 62.9,51.599 63.799,50.7 65.501,50.7 66.601,49.6 CURRENT0.19@67.65,49.6
  Bottom Layer w0.25: v1(55.5,54.1) 59.698,54.1 62.199,51.599 v1(62.3,51.6)
FILTERED_SENSE4: CLP4.1 CURRENT0.6 RLP4.2 | length 55.1
  Top Layer w0.25: CURRENT0.6@71.55,49.1 v1(73.7,49.1) ; RLP4.2@74.3,96.1 v1(75.5,96.1) CLP4.1@76.6,96.1
  Bottom Layer w0.25: v1(73.7,49.1) 79.001,54.401 79.001,92.599 v1(75.5,96.1)
FILTERED_SENSE5: CLP5.1 CURRENT0.7 RLP5.2 | length 39.9
  Top Layer w0.25: CURRENT0.7@71.55,49.6 73.3,49.6 v1(73.7,50) ; RLP5.2@74.3,82.1 v1(75.5,82.1) CLP5.1@76.6,82.1
  Bottom Layer w0.25: v1(73.7,50) 78.501,54.801 78.501,79.099 v1(75.5,82.1)
FILTERED_SENSE6: CLP6.1 CURRENT0.8 RLP6.2 | length 24.8
  Top Layer w0.25: CURRENT0.8@71.55,50.1 72.9,50.1 v1(73.7,50.9) ; RLP6.2@74.3,68.1 v1(75.5,68.1) CLP6.1@76.6,68.1
  Bottom Layer w0.25: v1(73.7,50.9) 78,55.2 78,65.6 v1@75.501,68.099
FILTERED_SENSE7: CLP7.1 CURRENT0.9 RLP7.2 | length 8
  Top Layer w0.25: CURRENT0.9@71.55,50.6 72.1,50.6 73.3,51.8 v1(73.7,51.8) ; RLP7.2@74.3,54.1 v1(75.5,54.1) CLP7.1@76.6,54.1
  Bottom Layer w0.25: v1(73.7,51.8) 75.5,53.6 v1(75.5,54.1)
FILTERED_SENSE8: CLP8.1 CURRENT1.16 RLP8.2 | length 55
  Top Layer w0.25: RLP8.2@94.3,96.1 v1(95.4,96.1) CLP8.1@96.6,96.1 ; v1@102.501,53.901 104.3,52.1 105.399,52.1 106.4,51.099 CURRENT1.16@107.65,51.1
  Bottom Layer w0.25: v1(95.4,96.1) 98.899,92.6 98.899,55.3 100.3,53.9 v1(102.5,53.9)
FILTERED_SENSE9: CLP9.1 CURRENT1.17 RLP9.2 | length 41.7
  Top Layer w0.25: RLP9.2@94.3,82.1 v1(95.5,82.1) CLP9.1@96.6,82.1 ; v1@102.499,53.001 102.801,53.001 104.195,51.604 105.295,51.604 106.301,50.601 CURRENT1.17@107.65,50.601
  Bottom Layer w0.25: v1(95.5,82.1) 98.4,79.2 98.4,55 100.4,53 v1(102.5,53)
FILTERED_SENSE10: CLP10.1 CURRENT1.18 RLP10.2 | length 28.3
  Top Layer w0.25: RLP10.2@94.3,68.1 v1(95.5,68.1) CLP10.1@96.6,68.1 ; v1@102.501,52.199 102.999,52.199 104,51.2 105.1,51.2 106.199,50.101 CURRENT1.18@107.65,50.101
  Bottom Layer w0.25: v1@95.501,68.099 97.901,65.699 97.901,54.799 100.5,52.2 v1(102.5,52.2)
FILTERED_SENSE11: CLP11.1 CURRENT1.19 RLP11.2 | length 16.3
  Top Layer w0.25: RLP11.2@94.3,54.1 v1(95.5,54.1) CLP11.1@96.6,54.1 ; v1@102.501,51.401 103.2,51.401 103.901,50.7 105.001,50.7 106.1,49.6 CURRENT1.19@107.65,49.6
  Bottom Layer w0.25: v1(95.5,54.1) 98,54.1 100.7,51.4 v1(102.5,51.4)
FILTERED_SENSE12: CLP12.1 CURRENT1.6 RLP12.2 | length 55.2
  Top Layer w0.25: CURRENT1.6@111.55,49.1 v1(113.8,49.1) ; RLP12.2@114.3,96.1 v1(115.5,96.1) CLP12.1@116.6,96.1
  Bottom Layer w0.25: v1(113.8,49.1) 114,49.1 118.899,54 118.899,92.699 v1@115.501,96.1
FILTERED_SENSE13: CLP13.1 CURRENT1.7 RLP13.2 | length 40.1
  Top Layer w0.25: CURRENT1.7@111.551,49.6 113.301,49.6 113.601,49.9 v1(113.8,49.9) ; RLP13.2@114.3,82.1 v1(115.5,82.1) CLP13.1@116.6,82.1
  Bottom Layer w0.25: v1(113.8,49.9) 114,49.9 118.399,54.299 118.399,79.199 v1@115.501,82.1
FILTERED_SENSE14: CLP14.1 CURRENT1.8 RLP14.2 | length 25
  Top Layer w0.25: CURRENT1.8@111.55,50.1 112.3,50.1 112.9,50.7 v1(113.8,50.7) ; RLP14.2@114.3,68.1 v1(115.5,68.1) CLP14.1@116.6,68.1
  Bottom Layer w0.25: v1(113.8,50.7) 114,50.7 117.901,54.599 117.901,65.701 v1@115.501,68.099
FILTERED_SENSE15: CLP15.2 CURRENT1.9 RLP15.1 | length 8.2
  Top Layer w0.25: CURRENT1.9@111.55,50.6 112,50.6 113,51.6 v1(113.8,51.6) ; RLP15.1@114.3,54.1 v1(115.5,54.1) CLP15.2@116.6,54.1
  Bottom Layer w0.25: v1(113.8,51.6) 115.501,53.301 v1@115.501,54.099
FILTERED_SENSE16: CLP16.1 CURRENT2.16 RLP16.2 | length 55
  Top Layer w0.25: RLP16.2@134.3,96.1 v1(135.5,96.1) CLP16.1@136.6,96.1 ; v1@142.501,53.901 142.6,53.901 144.299,52.199 145.1,52.199 146.199,51.101 CURRENT2.16@147.65,51.101
  Bottom Layer w0.25: v1(135.5,96.1) 139,92.6 139,55.2 140.3,53.9 v1(142.5,53.9)
FILTERED_SENSE17: CLP17.1 CURRENT2.17 RLP17.2 | length 41.6
  Top Layer w0.25: RLP17.2@134.3,82.1 v1(135.5,82.1) CLP17.1@136.6,82.1 ; v1@142.501,53.1 142.801,53.1 144.2,51.701 145,51.701 146.1,50.601 CURRENT2.17@147.65,50.601
  Bottom Layer w0.25: v1(135.5,82.1) 138.5,79.1 138.5,55 140.4,53.1 v1@142.5,53.1
  other v1: 142.5,53.1
FILTERED_SENSE18: CLP18.1 CURRENT2.18 RLP18.2 | length 28.2
  Top Layer w0.25: RLP18.2@134.3,68.1 v1(135.5,68.1) CLP18.1@136.6,68.1 ; v1@142.501,52.3 142.999,52.3 144.101,51.2 144.899,51.2 146.001,50.101 CURRENT2.18@147.65,50.101
  Bottom Layer w0.25: v1@135.501,68.099 138,65.6 138,54.8 140.5,52.3 v1@142.501,52.3
  other v1: 142.5,52.3
FILTERED_SENSE19: CLP19.1 CURRENT2.19 RLP19.2 | length 16.3
  Top Layer w0.25: RLP19.2@134.3,54.1 v1(135.5,54.1) CLP19.1@136.6,54.1 ; v1@142.501,51.5 143.2,51.5 144,50.7 144.8,50.7 145.9,49.6 CURRENT2.19@147.65,49.6
  Bottom Layer w0.25: v1@135.501,54.099 138,54.099 140.601,51.5 v1@142.501,51.5
  other v1: 142.5,51.5
FILTERED_SENSE20: CLP20.2 CURRENT2.6 RLP20.2 | length 55.3
  Top Layer w0.25: CURRENT2.6@151.55,49.1 v1(153.8,49.1) ; RLP20.2@154.3,96.1 v1(155.5,96.1) CLP20.2@156.6,96.1
  Bottom Layer w0.25: v1(153.8,49.1) 154.1,49.1 159.001,54.001 159.001,92.6 v1@155.501,96.1
FILTERED_SENSE21: CLP21.1 CURRENT2.7 RLP21.2 | length 40.2
  Top Layer w0.25: CURRENT2.7@151.551,49.6 153.301,49.6 153.601,49.9 v1(153.8,49.9) ; RLP21.2@154.3,82.1 v1(155.5,82.1) CLP21.1@156.6,82.1
  Bottom Layer w0.25: v1(153.8,49.9) 154,49.9 158.501,54.401 158.501,79.1 v1@155.501,82.1
FILTERED_SENSE22: CLP22.1 CURRENT2.8 RLP22.2 | length 25
  Top Layer w0.25: CURRENT2.8@151.551,50.101 153.001,50.101 153.601,50.7 v1(153.8,50.7) ; RLP22.2@154.3,68.1 v1(155.5,68.1) CLP22.1@156.6,68.1
  Bottom Layer w0.25: v1(153.8,50.7) 153.901,50.7 158,54.8 158,65.6 v1@155.501,68.099
FILTERED_SENSE23: CLP23.1 CURRENT2.9 RLP23.1 | length 8.2
  Top Layer w0.25: CURRENT2.9@151.551,50.601 152.6,50.601 153.499,51.5 v1(153.7,51.5) ; RLP23.1@154.3,54.1 v1(155.5,54.1) CLP23.1@156.6,54.1
  Bottom Layer w0.25: v1(153.7,51.5) 153.799,51.5 155.501,53.199 v1@155.501,54.099
FILTERED_STRAIN0: CSLP0.2 RSLP0.2 STRAINS0.4 | length 11.3
  Top Layer w0.3: CSLP0.2@50.1,121.4 v1(51.1,121.4) RSLP0.2@52.1,121.4 ; v1(53.1,114.6) 53.29,114.79 STRAINS0.4@54.687,114.79
  Bottom Layer w0.3: v1@51.099,121.401 53.101,119.399 v1(53.1,114.6)
FILTERED_STRAIN1: CSLP1.2 RSLP1.2 STRAINS0.5 | length 13.9
  Top Layer w0.3: STRAINS0.5@54.687,114.291 55.59,114.291 v1(56.1,114.8) v1(56.1,117.5) ; CSLP1.2@60.1,121.4 v1(61.1,121.4) RSLP1.2@62.1,121.4
  Bottom Layer w0.3: v1(56.1,117.5) 56.1,119.1 57.4,120.4 60.1,120.4 v1(61.1,121.4)
FILTERED_STRAIN2: CSLP2.2 RSLP2.2 STRAINS0.6 | length 17.6
  Top Layer w0.3: STRAINS0.6@59.589,114.291 61.791,114.291 v1(65.1,117.6) ; CSLP2.2@70.1,121.4 v1(71.1,121.4) RSLP2.2@72.1,121.4
  Bottom Layer w0.3: v1(65.1,117.6) 65.1,119.6 65.9,120.4 67.4,120.4 70.1,120.4 v1(71.1,121.4)
FILTERED_STRAIN3: CSLP3.2 RSLP3.2 STRAINS1.4 | length 19.2
  Top Layer w0.25: CSLP3.2@80.1,121.4 v1(81.1,121.4) RSLP3.2@82.1,121.4 ; v1(83.9,117.2) 84,117.3 91,117.3 93.51,114.79 STRAINS1.4@94.687,114.79
  Bottom Layer w0.3: v1(81.1,121.4) 81.1,120 v1(83.9,117.2)
FILTERED_STRAIN4: CSLP4.2 RSLP4.2 STRAINS1.5 | length 11.5
  Top Layer w0.25: CSLP4.2@90.1,121.4 v1(91.1,121.4) RSLP4.2@92.1,121.4
  Top Layer w0.3: v1(92.8,114.6) 93.11,114.291 STRAINS1.5@94.687,114.291
  Bottom Layer w0.25: v1(91.1,121.4) 91.7,120.8 91.7,115.7 v1(92.8,114.6)
FILTERED_STRAIN5: CSLP5.2 RSLP5.2 STRAINS1.6 | length 10.6
  Top Layer w0.25: STRAINS1.6@99.589,114.291 100.991,114.291 v1(101,114.3) ; CSLP5.2@100.1,121.4 v1(101.1,121.4) RSLP5.2@102.1,121.4
  Bottom Layer w0.3: v1(101,114.3) 101.1,114.4 v1(101.1,121.4)
FILTERED_STRAIN6: CSLP6.2 RSLP6.2 STRAINS2.4 | length 21
  Top Layer w0.25: CSLP6.2@110.1,121.4 v1(111.1,121.4) RSLP6.2@112.1,121.4 ; v1@120.299,117.101 123.398,117.101 123.799,116.699 123.799,115.701 124.711,114.789 STRAINS2.4@125.686,114.79
  Bottom Layer w0.25: v1(111.1,121.4) 112.1,120.4 118.9,120.4 120.3,119 v1(120.3,117.1)
FILTERED_STRAIN7: CSLP7.2 RSLP7.2 STRAINS2.5 | length 11.9
  Top Layer w0.25: CSLP7.2@120.1,121.4 v1(121.1,121.4) RSLP7.2@122.1,121.4 ; v1(124,114.5) 124.21,114.291 STRAINS2.5@125.686,114.29
  Bottom Layer w0.25: v1@121.099,121.401 123.799,118.701 123.799,114.7 v1(124,114.5)
FILTERED_STRAIN8: CSLP8.2 RSLP8.2 STRAINS2.6 | length 11.6
  Top Layer w0.25: v1@129.001,114.299 STRAINS2.6@130.589,114.292 ; CSLP8.2@130.1,121.4 v1(131.1,121.4) RSLP8.2@132.1,121.4
  Bottom Layer w0.25: v1(129,114.3) 130,115.3 130,120.3 v1(131.1,121.4)
FILTERED_STRAIN9: CSLP9.2 RSLP9.2 STRAINS3.4 | length 13.7
  Top Layer w0.25: STRAINS3.4@134.687,114.79 136.51,114.79 v1(136.8,114.5) ; CSLP9.2@140.1,121.4 v1(141.1,121.4) RSLP9.2@142.1,121.4
  Bottom Layer w0.25: v1(136.8,114.5) 138.2,114.5 141.1,117.4 v1(141.1,121.4)
FILTERED_STRAIN10: CSLP10.2 RSLP10.2 STRAINS3.5 | length 23.7
  Top Layer w0.25: STRAINS3.5@134.688,114.292 135.808,114.292 v1(136.1,114) ; v1(139.8,117.1) 149.501,117.1 v1(149.6,117.2) ; CSLP10.2@150.1,121.4 v1(151.1,121.4) RSLP10.2@152.1,121.4
  Bottom Layer w0.25: v1(136.1,114) 136.1,114.7 136.999,115.6 138.399,115.6 139.801,116.999 v1@139.801,117.101 ; v1(149.6,117.2) 149.6,118.1 150.5,119 150.5,120.8 v1(151.1,121.4)
FILTERED_STRAIN11: CSLP11.2 RSLP11.2 STRAINS3.6 | length 27
  Top Layer w0.25: STRAINS3.6@139.59,114.292 143.99,114.292 146.301,116.6 147.101,116.6 147.7,116.001 v1@150.2,116.001 ; CSLP11.2@160.1,121.4 v1(161.1,121.4) RSLP11.2@162.1,121.4
  Bottom Layer w0.25: v1(150.2,116) 151.499,117.299 151.899,117.299 155.6,117.299 159.699,121.401 v1@161.099,121.401

## Text inside footprints (layer, text, board x,y; h text height)
C1: Bottom Overlay "+" at 177.382,116.61 h2.03 r315; Bottom Overlay "O" at 178.101,106.145 h2.03
C2: Bottom Overlay "+" at 186.59,122.382 h2.03 r45; Bottom Overlay "O" at 197.055,123.101 h2.03 r90
C3: Bottom Overlay "+" at 219.819,105.61 h2.03 r45; Bottom Overlay "O" at 219.101,95.145 h2.03
C4: Bottom Overlay "+" at 176.59,79.819 h2.03 r135; Bottom Overlay "O" at 187.055,79.101 h2.03 r90
DISPLAY: Top Overlay "128x32 0.91'' /   OLED I2C" at 190.317,102.236 h2 r1; Top Overlay "SDA" at 182.4,105.254 h1; Top Overlay "SCL" at 182.6,102.855 h1; Top Overlay "GND" at 182.4,98.053 h1; Top Overlay "3V3" at 182.401,99.315 h1
OUT0: Bottom Overlay "1" at 48.03,99.266 h0.51 r90
OUT1: Bottom Overlay "1" at 48.03,85.29 h0.51 r90
OUT2: Bottom Overlay "1" at 48.03,71.29 h0.51 r90
OUT3: Bottom Overlay "1" at 48.03,57.29 h0.51 r90
OUT4: Bottom Overlay "1" at 68.03,99.278 h0.51 r90
OUT5: Bottom Overlay "1" at 68.03,85.302 h0.51 r90
OUT6: Bottom Overlay "1" at 68.03,71.302 h0.51 r90
OUT7: Bottom Overlay "1" at 68.03,57.29 h0.51 r90
OUT8: Bottom Overlay "1" at 88.03,99.29 h0.51 r90
OUT9: Bottom Overlay "1" at 88.03,85.29 h0.51 r90
OUT10: Bottom Overlay "1" at 88.03,71.29 h0.51 r90
OUT11: Bottom Overlay "1" at 88.03,57.29 h0.51 r90
OUT12: Bottom Overlay "1" at 108.031,99.29 h0.51 r90
OUT13: Bottom Overlay "1" at 108.031,85.29 h0.51 r90
OUT14: Bottom Overlay "1" at 108.031,71.29 h0.51 r90
OUT15: Bottom Overlay "1" at 108.031,57.29 h0.51 r90
OUT16: Bottom Overlay "1" at 128.03,99.29 h0.51 r90
OUT17: Bottom Overlay "1" at 128.03,85.29 h0.51 r90
OUT18: Bottom Overlay "1" at 128.03,71.29 h0.51 r90
OUT19: Bottom Overlay "1" at 128.03,57.29 h0.51 r90
OUT20: Bottom Overlay "1" at 148.03,99.29 h0.51 r90
OUT21: Bottom Overlay "1" at 148.03,85.29 h0.51 r90
OUT22: Bottom Overlay "1" at 148.03,71.29 h0.51 r90
OUT23: Bottom Overlay "1" at 148.03,57.29 h0.51 r90
SENSOR0: Bottom Overlay "1" at 58.208,124.03 h0.51 r180
SENSOR1: Bottom Overlay "1" at 68.208,124.03 h0.51 r180
SENSOR2: Bottom Overlay "1" at 78.208,124.03 h0.51 r180
SENSOR3: Bottom Overlay "1" at 88.208,124.03 h0.51 r180
SENSOR4: Bottom Overlay "1" at 98.208,124.03 h0.51 r180
SENSOR5: Bottom Overlay "1" at 108.208,124.03 h0.51 r180
SENSOR6: Bottom Overlay "1" at 118.208,124.03 h0.51 r180
SENSOR7: Bottom Overlay "1" at 128.208,124.03 h0.51 r180
SENSOR8: Bottom Overlay "1" at 138.208,124.03 h0.51 r180
SENSOR9: Bottom Overlay "1" at 148.208,124.03 h0.51 r180
SENSOR10: Bottom Overlay "1" at 158.208,124.03 h0.51 r180
SENSOR11: Bottom Overlay "1" at 168.208,124.03 h0.51 r180